# EAGLE board shield (EAGLE 8.1.1)

Size 100 x 80 mm. Coordinates in mm from the lower left corner, seen from the top.
Outline: 0,0 100,0 100,80 0,80 0,0
Copper layers (1*16): Top 0.035mm / dielectric 1.5mm / Bottom 0.035mm
Design rules "default": minimum track width 10mil, minimum drill 24mil, track to track 8mil, track to pad 8mil, pad to pad 8mil, via to via 8mil, smd to smd 8mil, copper to edge 40mil, drill to drill 8mil, minimum pad ring 10mil, minimum via ring 8mil, stop-mask expansion 4mil, vias tented up to drill 0mil, thermal gap 10mil

## Footprints (pad centres in the part's own frame; a part is rotated, then mirrored left to right if it is on the bottom)
C025-025X050 = drill 0.813 octagon: 1 -1.27,0; 2 1.27,0
DO41-10 = drill 1.118 pad 1.93: A 5.08,0; C -5.08,0
MULTIWATT-15 = drill 1.2 long: 1 -8.89,-7.62; 2 -7.62,-2.54; 3 -6.35,-7.62; 4 -5.08,-2.54; 5 -3.81,-7.62; 6 -2.54,-2.54; 7 -1.27,-7.62; 8 0,-2.54; 9 1.27,-7.62; 10 2.54,-2.54; 11 3.81,-7.62; 12 5.08,-2.54; 13 6.35,-7.62; 14 7.62,-2.54; 15 8.89,-7.62
1X06 = drill 1.016 octagon: 1 -6.35,0; 2 -3.81,0; 3 -1.27,0; 4 1.27,0; 5 3.81,0; 6 6.35,0
1X02 = drill 1.016 long: 1 -1.27,0; 2 1.27,0
JP1 = drill 0.914 long: 1 0,-1.27; 2 0,1.27
LED5MM = drill 0.813 pad 1.676 octagon: A -1.27,0; K 1.27,0
0207/7 = drill 0.813 octagon: 1 -3.81,0; 2 3.81,0
0207/10 = drill 0.813 octagon: 1 -5.08,0; 2 5.08,0

## Placement (x,y rotation side)
C1  [C025-025X050]  -139.7,-393.7 0 top  (outside the outline)
D1  1N4004  [DO41-10]  -26.67,-118.11 0 top  (outside the outline)
D2  1N4004  [DO41-10]  -26.67,-138.43 0 top  (outside the outline)
D3  1N4004  [DO41-10]  -26.67,-158.75 0 top  (outside the outline)
D4  1N4004  [DO41-10]  -26.67,-179.07 0 top  (outside the outline)
D5  1N4004  [DO41-10]  -26.67,-229.87 0 top  (outside the outline)
D6  1N4004  [DO41-10]  -26.67,-250.19 0 top  (outside the outline)
D7  1N4004  [DO41-10]  -26.67,-270.51 0 top  (outside the outline)
D8  1N4004  [DO41-10]  -26.67,-290.83 0 top  (outside the outline)
IC1  L298  [MULTIWATT-15]  -24.13,13.97 0 top  (outside the outline)
JP1  [1X06]  -21.59,25.4 0 top  (outside the outline)
JP2  [1X02]  -33.02,-196.85 0 top  (outside the outline)
JP3  [1X02]  -33.02,-212.09 0 top  (outside the outline)
JP4  [JP1]  -49.53,-346.71 0 top  (outside the outline)
JP5  [JP1]  -64.77,-346.71 0 top  (outside the outline)
JP6  [JP1]  -80.01,-346.71 0 top  (outside the outline)
JP7  [JP1]  -125.73,-346.71 0 top  (outside the outline)
JP8  [JP1]  -110.49,-346.71 0 top  (outside the outline)
JP9  [JP1]  -140.97,-346.71 0 top  (outside the outline)
LED1  [LED5MM]  -21.59,20.32 0 top  (outside the outline)
LED2  [LED5MM]  -31.75,-25.4 0 top  (outside the outline)
LED3  [LED5MM]  -31.75,-55.88 0 top  (outside the outline)
LED4  [LED5MM]  -31.75,-86.36 0 top  (outside the outline)
LED5  [LED5MM]  -138.43,-364.49 0 top  (outside the outline)
R1  [0207/7]  -30.48,-10.16 0 top  (outside the outline)
R2  [0207/7]  -30.48,-40.64 0 top  (outside the outline)
R3  [0207/7]  -30.48,-71.12 0 top  (outside the outline)
R4  [0207/7]  -30.48,-101.6 0 top  (outside the outline)
R5  [0207/7]  -30.48,-307.34 0 top  (outside the outline)
R6  [0207/7]  -30.48,-321.31 0 top  (outside the outline)
R7  [0207/7]  -30.48,-335.28 0 top  (outside the outline)
R8  [0207/7]  -30.48,-349.25 0 top  (outside the outline)
R9  [0207/10]  -135.89,-379.73 0 top  (outside the outline)

## Library data of the parts
C1 = rcl
D1-D8 JP1 LED1-LED5 = adafruit
IC1 = st-microelectronics; MPN: L298N; OC_FARNELL: 1589425; OC_NEWARK: 32M1527
JP2 JP3 = pinhead
JP4-JP9 = jumper
R1-R9 = resistor

## Nets
+12V: D5.C D6.C D7.C IC1.4
GND: D1.A D2.A D3.A D4.A IC1.8 JP7.2 JP9.2 R1.1
N$1: IC1.6 JP1.6
N$2: IC1.5 JP1.5 LED4.A R8.1
N$3: IC1.7 JP1.4 LED3.A R7.1
N$4: IC1.10 JP1.3 LED2.A R6.1
N$5: IC1.12 JP1.2 LED1.A R5.1
N$6: IC1.11 JP1.1
N$7: LED1.K R1.2
N$8: LED2.K R2.2
N$9: LED3.K R3.2
N$10: LED4.K R4.2
N$11: D4.C D8.A IC1.14 JP2.2
N$12: D3.C D7.A IC1.13 JP2.1
N$13: D2.C D6.A IC1.3 JP3.2
N$14: D1.C D5.A IC1.2 JP3.1
N$15: JP4.1 R5.2
N$16: JP5.1 R6.2
N$17: JP6.1 R7.2
N$18: JP8.1 R8.2
N$19: IC1.1 JP7.1
N$20: IC1.15 JP9.1
N$22: LED5.K R9.2
N$23: C1.2 R9.1
VCC: IC1.9 JP4.2 JP5.2 JP6.2 JP8.2 LED5.A

## Tracks (layer width: path | path; a pad name or v marks a point on that pad's centre or on a via)
+12V  (3 unrouted)
GND  (7 unrouted)
N$1  (1 unrouted)
N$2  (3 unrouted)
N$3  (3 unrouted)
N$4  (3 unrouted)
N$5  (3 unrouted)
N$6  (1 unrouted)
N$7  (1 unrouted)
N$8  (1 unrouted)
N$9  (1 unrouted)
N$10  (1 unrouted)
N$11  (3 unrouted)
N$12  (3 unrouted)
N$13  (3 unrouted)
N$14  (3 unrouted)
N$15  (1 unrouted)
N$16  (1 unrouted)
N$17  (1 unrouted)
N$18  (1 unrouted)
N$19  (1 unrouted)
N$20  (1 unrouted)
N$22  (1 unrouted)
N$23  (1 unrouted)
VCC  (5 unrouted)